# EAGLE board icetube_tube (EAGLE 6.4)
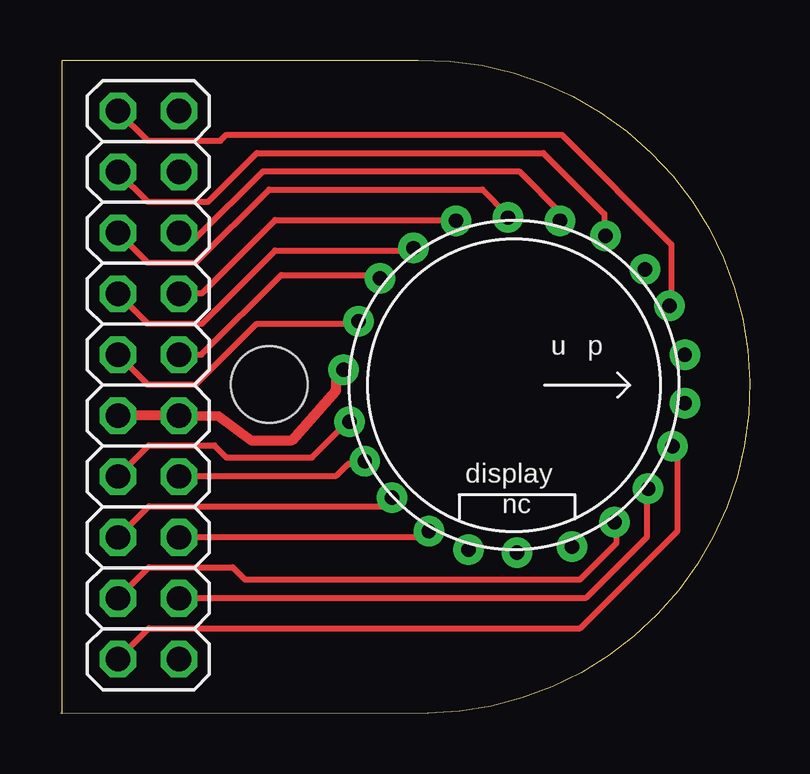
[diagram p0: board, top side]
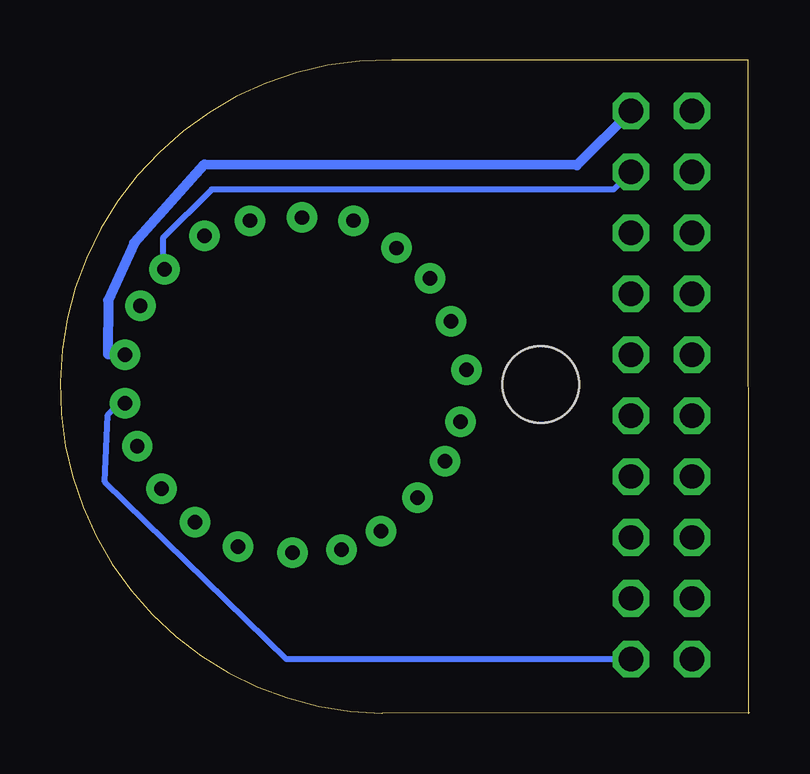
[diagram p1: board, bottom side, seen from below]

Size 28.74 x 27.26 mm. Coordinates in mm from the lower left corner, seen from the top.
Outline: 0.08,27.26 0.07,0
Outline: 0,0.04 15.32,0.01 arc180 14.93,27.25 0.08,27.25
Copper layers (1*16): Top 0.0356mm / dielectric 1.5011mm / Bottom 0.0356mm
Design rules "osh_boards": minimum track width 6mil, minimum drill 13mil, track to track 6mil, track to pad 6mil, pad to pad 6mil, via to via 6mil, smd to smd 6mil, copper to edge 15mil, drill to drill 6mil, minimum pad ring 7mil, minimum via ring 7mil, stop-mask expansion 4mil, vias tented up to drill 0mil, thermal gap 10mil
Holes 3.2 mm at 8.71,13.72

## Footprints (pad centres in the part's own frame; a part is rotated, then mirrored left to right if it is on the bottom)
IV18 = drill 0.6 pad 1.27: 1 -0.635,-7.112; 2 1.524,-6.858; 3 3.175,-6.223; 4 4.699,-5.08; 5 6.096,-3.556; 6 6.858,-1.905; 7 6.985,0.127; 8 6.731,2.413; 9 5.715,4.191; 10 4.318,5.588; 11 2.54,6.604; 12 0.762,7.112; 13 -1.27,7.112; 14 -3.302,6.477; 15 -4.826,5.461; 16 -6.223,3.81; 17 -6.858,1.905; 18 -6.985,-0.254; 19 -6.858,-2.413; 20 -5.715,-4.191; 21 -4.445,-5.588; 22 -2.667,-6.477
2X10 = drill 1.016 octagon: 1 -11.43,-1.27; 2 -11.43,1.27; 3 -8.89,-1.27; 4 -8.89,1.27; 5 -6.35,-1.27; 6 -6.35,1.27; 7 -3.81,-1.27; 8 -3.81,1.27; 9 -1.27,-1.27; 10 -1.27,1.27; 11 1.27,-1.27; 12 1.27,1.27; 13 3.81,-1.27; 14 3.81,1.27; 15 6.35,-1.27; 16 6.35,1.27; 17 8.89,-1.27; 18 8.89,1.27; 19 11.43,-1.27; 20 11.43,1.27

## Placement (x,y rotation side)
DIS1  IV18  [IV18]  18.92,13.7 270 top
JP2  male  [2X10]  3.68,13.7 270 top

## Library data of the parts
DIS1 = vfd
JP2 = pinhead

## Nets
GND: DIS1.1 JP2.11 JP2.12
VBIAS: DIS1.13 JP2.2
VFD1: DIS1.15 JP2.4
VFD2: DIS1.22 JP2.9
VFD3: DIS1.16 JP2.3
VFD4: DIS1.21 JP2.10
VFD5: DIS1.17 JP2.6
VFD6: DIS1.20 JP2.7
VFD7: DIS1.19 JP2.8
VFD8: DIS1.18 JP2.5
VFD9: DIS1.14 JP2.1
VFD_A: DIS1.12 JP2.20
VFD_B: DIS1.10 JP2.18
VFD_C: DIS1.4 JP2.15
VFD_D: DIS1.3 JP2.14
VFD_E: DIS1.5 JP2.16
VFD_F: DIS1.11 JP2.19
VFD_G: DIS1.9 JP2.17
VFD_H: DIS1.2 JP2.13

## Tracks (layer width: path | path; a pad name or v marks a point on that pad's centre or on a via)
GND
  Top 0.254: 5.16,12.45 4.98,12.45 JP2.12 | JP2.11 2.44,12.45 | 11.81,14.28 DIS1.1
  Top 0.406: 2.44,12.45 4.98,12.45 | JP2.12 6.6,12.4 7.96,11.39 9.67,11.39 11.51,13.47 11.51,13.98 11.81,14.28
VBIAS
  Bottom 0.254: 26.06,14.99 DIS1.13
  Bottom 0.406: JP2.2 7.21,22.87 22.72,22.89 25.65,19.62 26.74,17.24 26.75,14.99 26.06,14.99
VFD1
  Bottom 0.254: JP2.4 5.69,21.85 22.43,21.85 24.46,19.82 24.46,18.61 DIS1.15
VFD2
  Top 0.254: JP2.9 3.66,13.72 5.67,13.72 8.21,16.26 12.52,16.26 12.52,16.29 DIS1.22
VFD3
  Top 0.254: JP2.3 3.66,21.34 6.17,21.34 8.21,23.38 20.14,23.38 22.68,20.84 22.68,20.07 22.73,20.03 DIS1.16
VFD4
  Top 0.254: JP2.10 5.9,14.97 9.22,18.3 13.49,18.3 | 13.49,18.3 13.54,18.3 | 13.49,18.3 DIS1.21
VFD5
  Top 0.254: DIS1.17 20.85,20.58 20.91,20.58 20.91,20.84 19.13,22.61 8.46,22.61 5.67,19.82 5.41,19.82 5.16,20.07 5.13,20.05 JP2.6
VFD6
  Top 0.254: JP2.7 3.66,16.26 5.92,16.26 8.97,19.31 14.81,19.31 14.81,19.33 DIS1.20
VFD7
  Top 0.254: DIS1.19 16.48,20.58 8.97,20.58 5.92,17.53 5.16,17.53 5.13,17.51 JP2.8
VFD8
  Top 0.254: JP2.5 3.66,18.8 5.67,18.8 8.71,21.85 17.6,21.85 18.62,20.84 18.62,20.64 | 18.62,20.64 18.62,20.58 | 18.62,20.64 DIS1.18
VFD9
  Top 0.254: JP2.1 3.66,23.88 6.68,23.88 6.94,24.14 20.91,24.14 25.48,19.57 25.48,17.03 25.42,17.03 DIS1.14
VFD_A
  Bottom 0.254: JP2.20 19.31,2.27 26.88,9.66 26.75,12.45 26.24,12.96 26.22,12.94 DIS1.12
VFD_B
  Top 0.254: JP2.18 4.98,4.83 21.92,4.83 24.46,7.37 24.46,9.41 24.48,9.41 DIS1.10
VFD_C
  Top 0.254: JP2.15 3.71,8.64 14.05,8.64 14.05,8.79 DIS1.4
VFD_D
  Top 0.254: JP2.14 4.98,9.91 11.51,9.91 12.02,10.42 12.6,10.42 DIS1.3
VFD_E
  Top 0.254: DIS1.5 15.14,7.37 4.98,7.37 JP2.16
VFD_F
  Top 0.254: JP2.19 3.71,3.56 21.67,3.56 25.73,7.63 25.73,10.95 DIS1.11
VFD_G
  Top 0.254: JP2.17 3.71,6.1 7.19,6.1 7.7,5.6 21.67,5.6 23.19,7.12 23.19,7.9 DIS1.9
VFD_H
  Top 0.254: JP2.13 3.71,11.18 6.43,11.18 6.94,10.68 10.49,10.68 12.02,12.2 12.04,12.2 DIS1.2